# Altium PCB PCB.PcbDoc
Units mm, origin at the board's own origin, x right, y up, seen from the top; angles counter-clockwise.
Board outline 23 x 36 mm, 2 copper layers (Top Layer, Bottom Layer); 17 components, 17 nets, 73 pads, 22 vias.
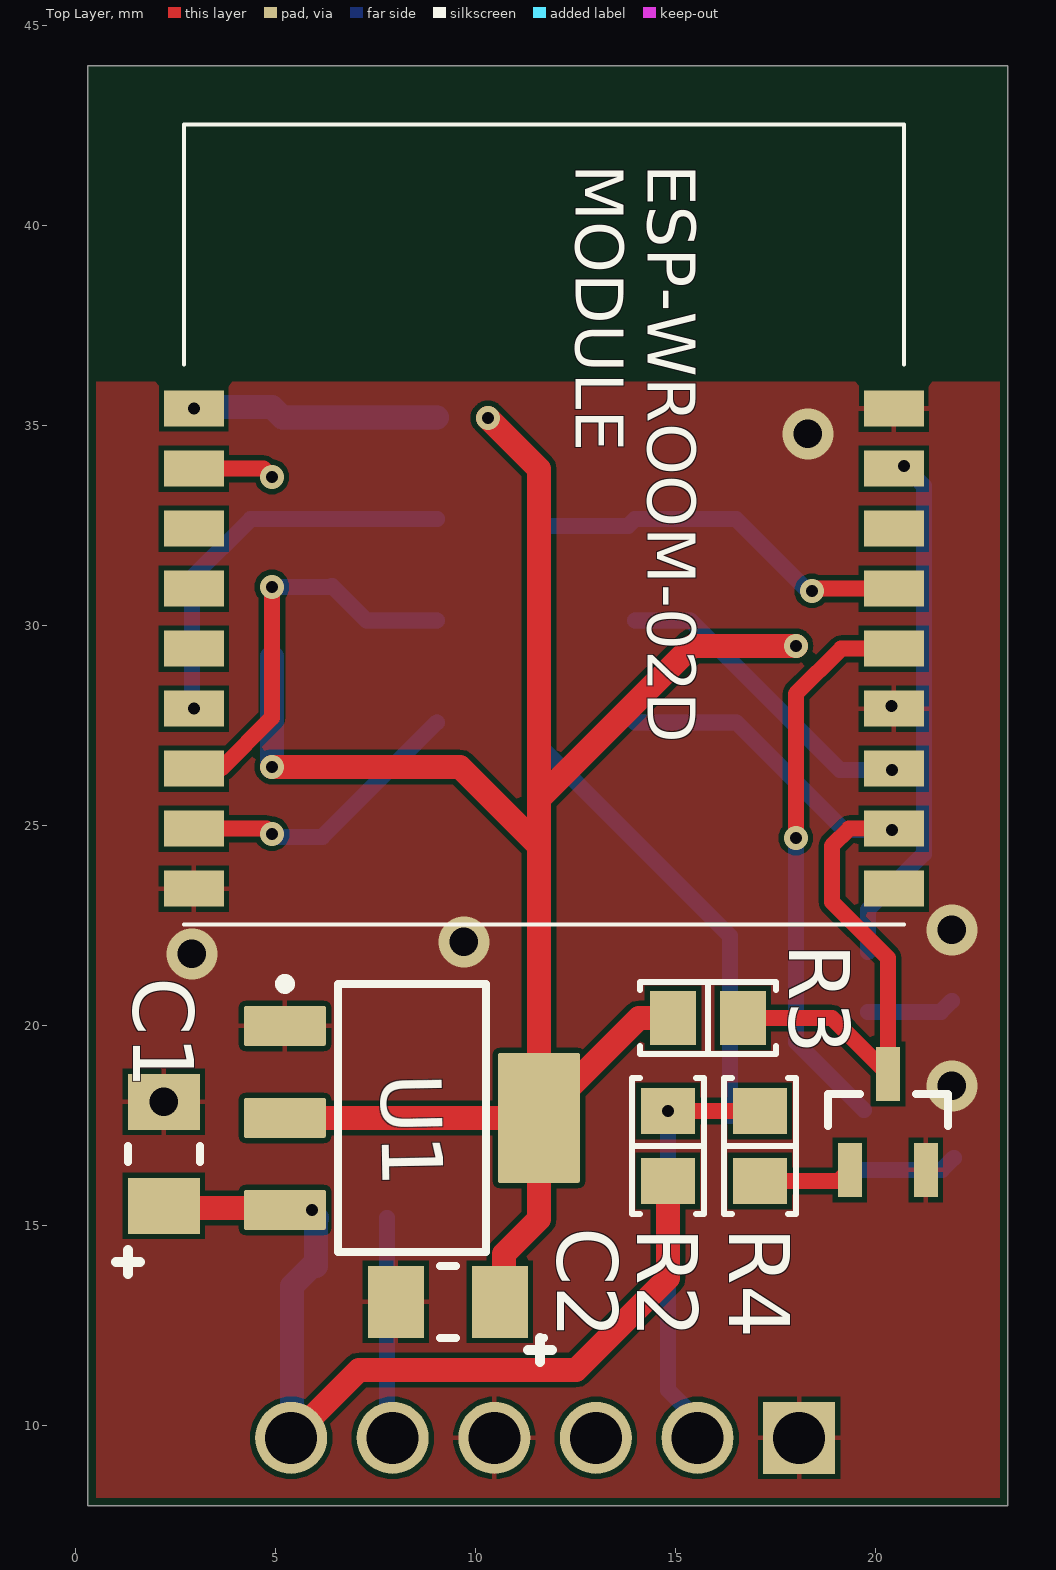
[diagram p0: Top Layer view]
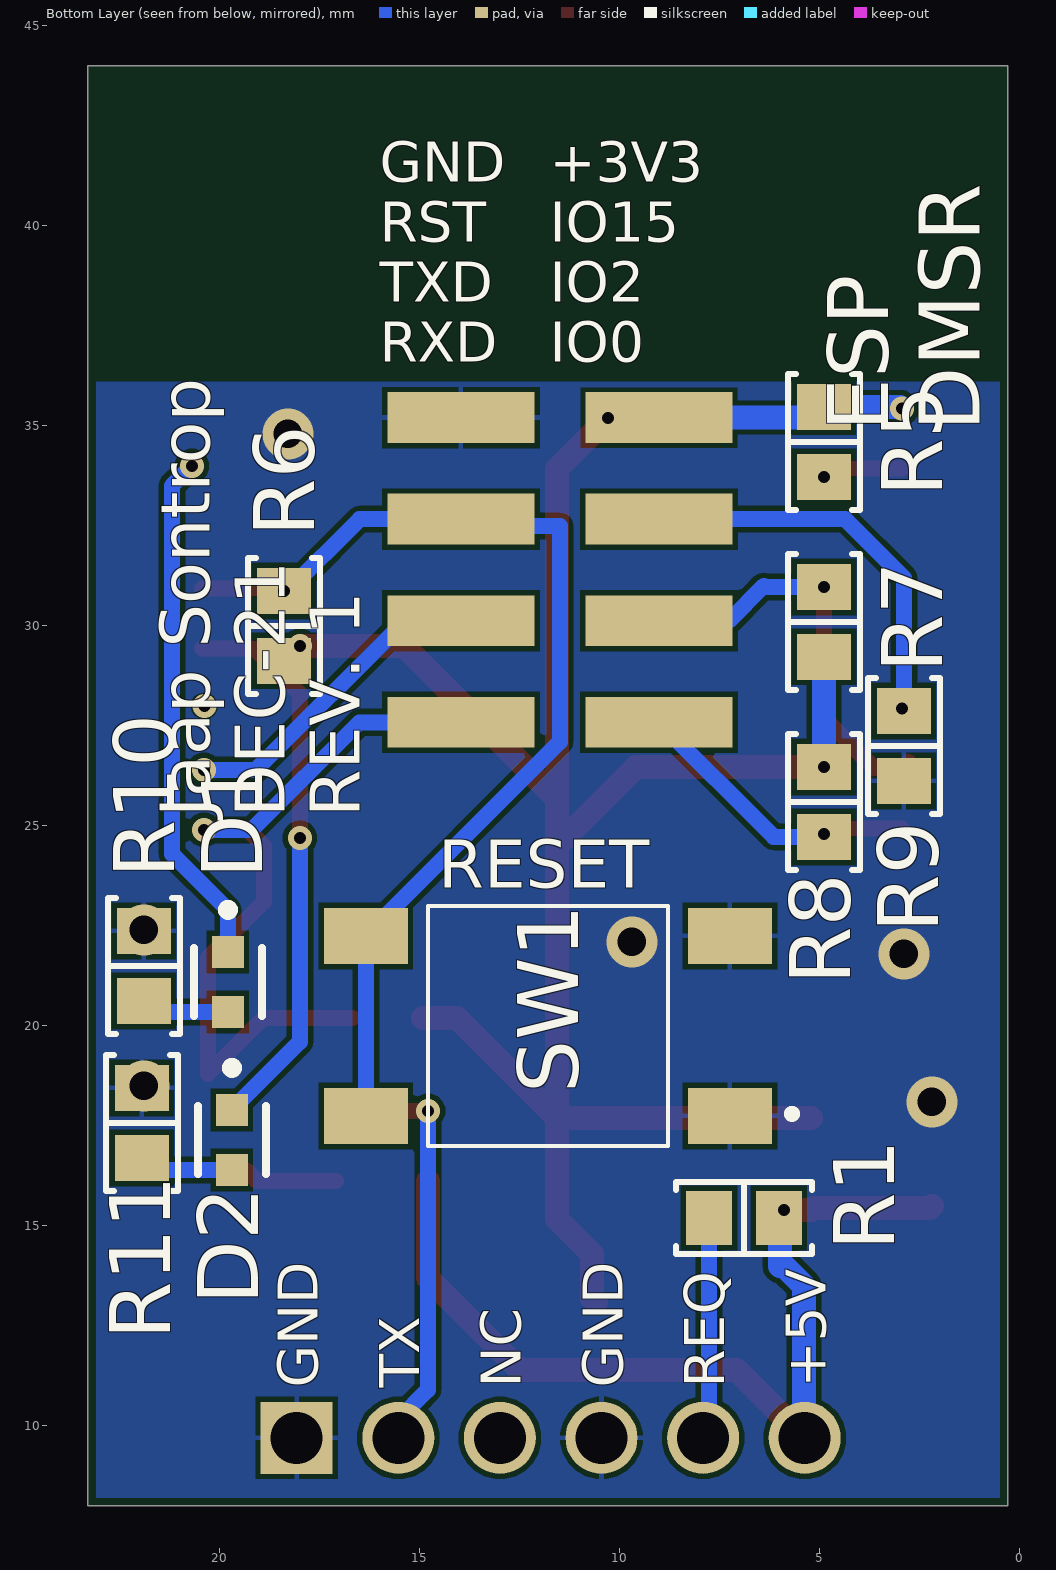
[diagram p1: Bottom Layer view, seen from below]
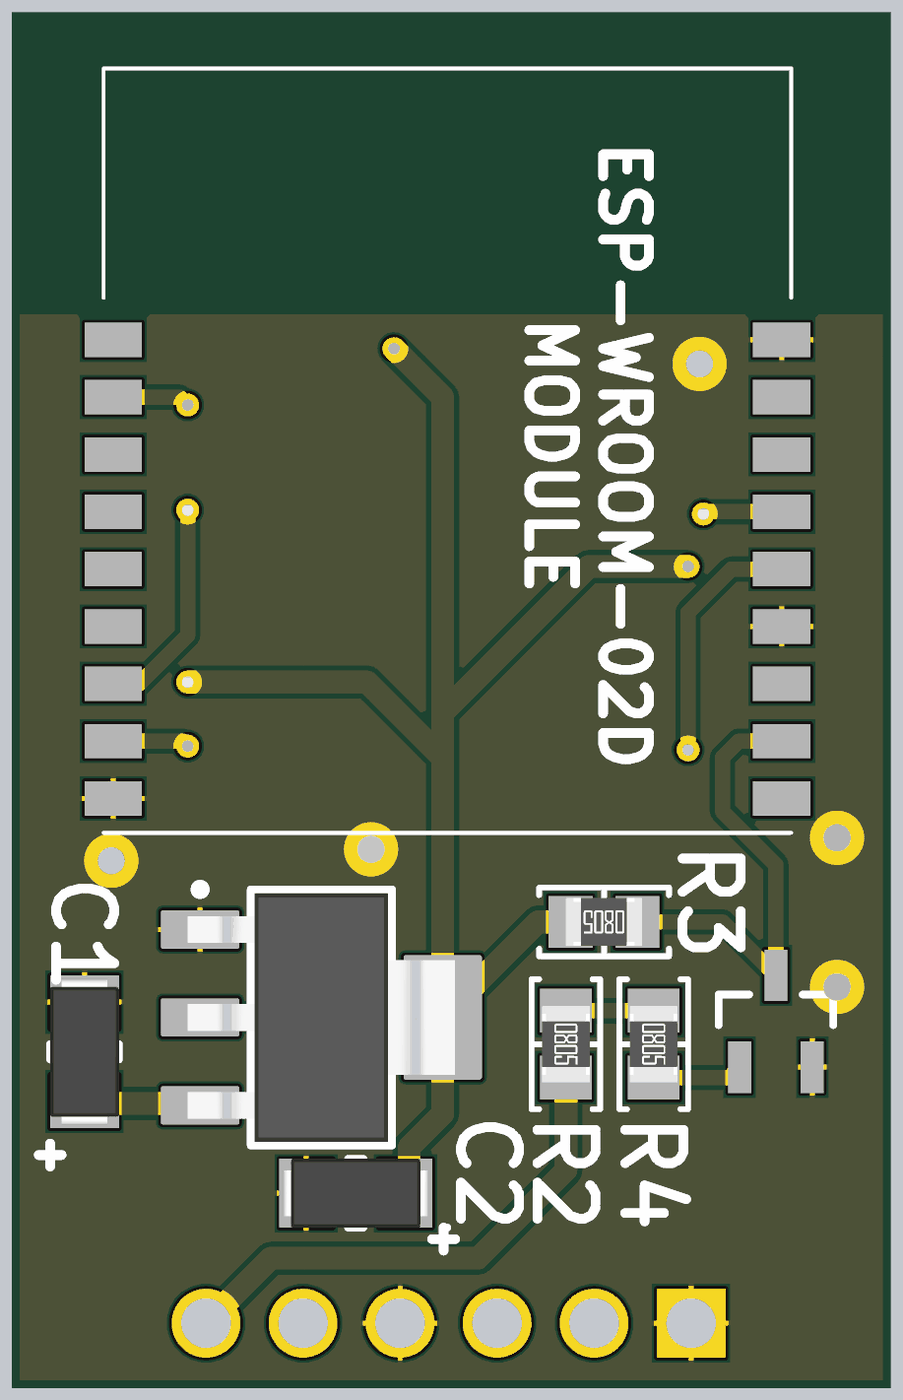
[diagram p2: 3D render of the assembled board from above, using the file's embedded part models]
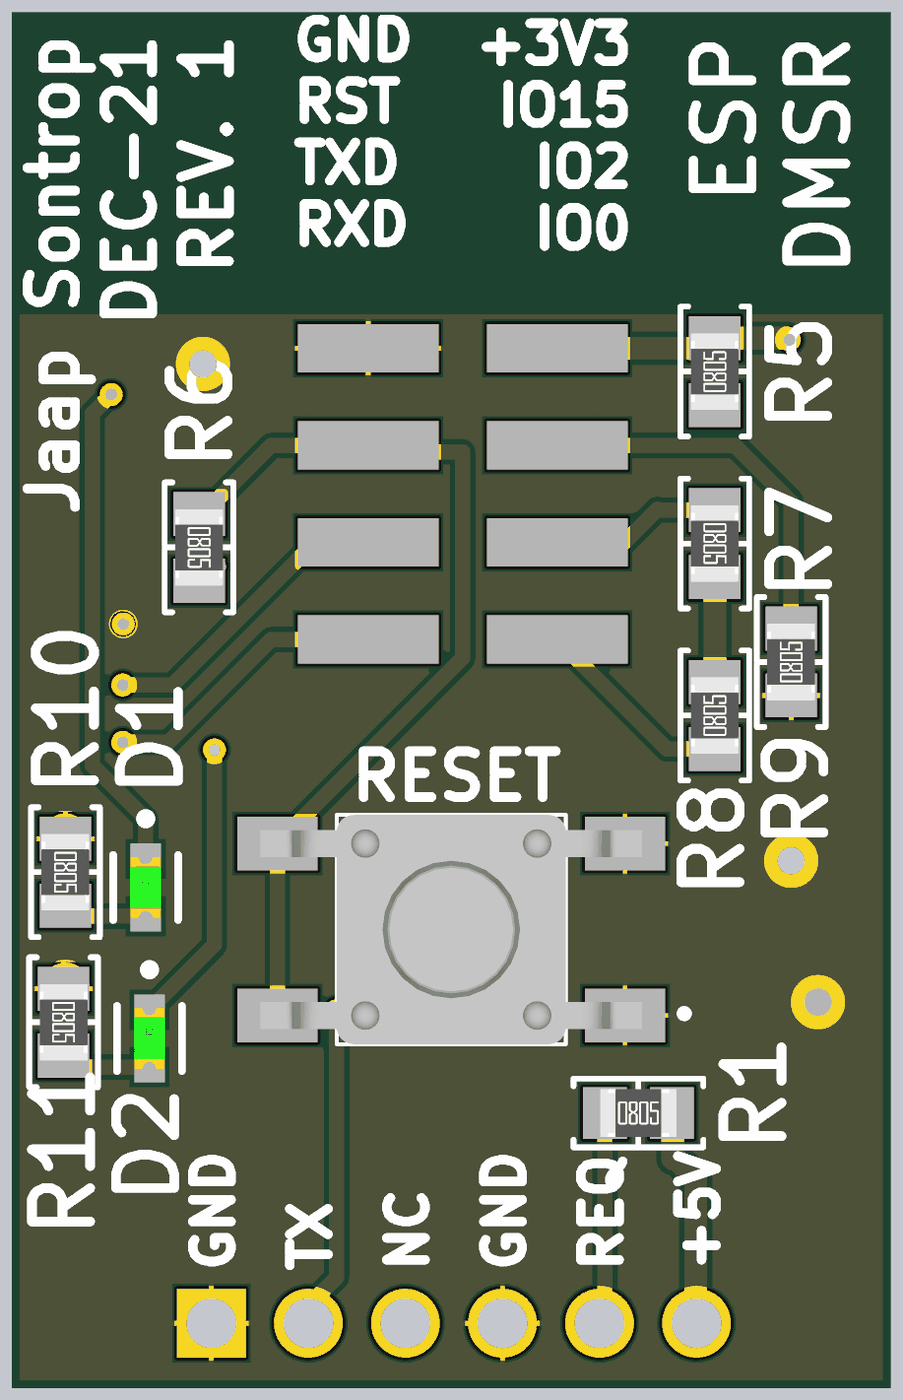
[diagram p3: 3D render of the assembled board from below, using the file's embedded part models]

## Layer stack, top to bottom
Top Solder: solder mask 0.0102, Solder Resist, Dk 3.5
Top Layer: signal copper 0.0356
Dielectric 1: dielectric 0.32, FR-4, Dk 4.8
Bottom Layer: signal copper 0.0356
Bottom Solder: solder mask 0.0102, Solder Resist, Dk 3.5

## Board outline
0.3,8 23.3,8 23.3,44 0.3,44

## Design rules (kind name [scope] priority, off if disabled: settings)
BoardOutlineClearance [All] p1: gap=0.2 ignorepadtopadclearanceinfootprint=FALSE
Clearance [All] p1: gap=0.127 ignorepadtopadclearanceinfootprint=FALSE except(0.25: Arc-Hole Track-Hole SMDPad-Hole THPad-Hole Via-Hole Fill-Hole Poly-Hole Region-Hole Text-Hole)
ComponentClearance [All] p1: gap=0.127 collisioncheckmode=3 verticalgap=0.127 showdistances=TRUE
DiffPairsRouting [All] p1: maxlimit=0.254 minlimit=0.127 mostfreqgap=0.127 toplayer_minwidth=0.127 toplayer_maxwidth=25.4 toplayer_prefwidth=0.127 bottomlayer_minwidth=0.127 bottomlayer_maxwidth=25.4 bottomlayer_prefwidth=0.127 maxuncoupledlength=12.7
Height [All] p1: minheight=0 maxheight=1816.048 prefheight=12.7
HoleSize [All] p1: absolutevalues=TRUE maxlimit=6.3 minlimit=0.3 maxpercent=80.000 minpercent=20.000
HoleToHoleClearance [All] p1: gap=0.25 allowstackedmicrovias=FALSE
MinimumAnnularRing [All] p1: minimumring=0.076
MinimumSolderMaskSliver [All] p1: minsoldermaskwidth=0
PlaneClearance [All] p1: clearance=0.127
PlaneConnect PlaneConnectPowerPads [InPadClass('PowerPads')] p1: planeconnectstyle=Direct reliefexpansion=0.508 reliefentries=4 reliefconductorwidth=0.254 reliefairgap=0.254
PlaneConnect [All] p2: pad.planeconnectstyle=Relief pad.reliefexpansion=0.3 pad.reliefentries=4 pad.reliefconductorwidth=0.127 pad.reliefairgap=0.127 via.planeconnectstyle=Direct via.reliefexpansion=0.3 via.reliefentries=4 via.reliefconductorwidth=0.127 via.reliefairgap=0.127
PolygonConnect PolygonConnectPowerPads [All vs (InPadClass('PowerPads'))] p1: connectstyle=Direct reliefconductorwidth=0.254 reliefentries=4 polygonreliefangle="90 Angle" airgapwidth=0.254
PolygonConnect [All] p2: thpad.connectstyle=Relief thpad.reliefconductorwidth=0.127 thpad.reliefentries=4 thpad.polygonreliefangle="90 Angle" thpad.airgapwidth=0.127 smdpad.connectstyle=Relief smdpad.reliefconductorwidth=0.127 smdpad.reliefentries=4 smdpad.polygonreliefangle="90 Angle" smdpad.airgapwidth=0.127 via.connectstyle=Direct via.reliefconductorwidth=0.127 via.reliefentries=4 via.polygonreliefangle="90 Angle" via.airgapwidth=0.127
RoutingVias [All] p1: holewidth=0.3 width=0.6 viastyle="Through Hole" minholewidth=0.3 minwidth=0.6 maxholewidth=0.6 maxwidth=6.6
SilkToSilkClearance [All] p1: silktosilkclearance=0
SilkToSolderMaskClearance [IsPad] p1: minsilkscreentomaskgap=0.127 clearancetoexposedcopper=TRUE
SolderMaskExpansion [All] p1: expansion=0.075 istentingtop=FALSE
Width Power_width [(InNet('+3V3') OR InNet('+5V'))] p1: maxlimit=1 minlimit=0.3 preferedwidth=0.6 // Power traces
Width [All] p2: maxlimit=0.508 minlimit=0.2 preferedwidth=0.4
20 further rules are at their usual default settings.

## Components (designator, comment, footprint, x,y, rotation, side; value= is the part's Value field where it differs from the comment)
C1 "TAJA106K016RNJ" CAPMP3217X18-T_V 2.2,16.8 r90 top
C2 "TAJA106K016RNJ" CAPMP3217X18-T_V 9.3,13.1 r180 top
D1 "LTST-C190GKT" FP-LTST-C190GKT-MFG 19.8,21.1 r270 bottom
D2 "LTST-C190GKT" FP-LTST-C190GKT-MFG 19.7,17.15 r270 bottom
R1 "10 kOhms" "RES 0805_2012" 6.9,15.2 r180 bottom
R2 "2.2 kOhms" "RES 0805_2012" 14.8,17 r270 top
R3 "2.2 kOhms" "RES 0805_2012" 15.8,20.2 r180 top
R4 "1 kOhms" "RES 0805_2012" 17.1,17 r270 top
R5 "10 kOhms" "RES 0805_2012" 4.9,34.6 r90 bottom
R6 "10 kOhms" "RES 0805_2012" 18.4,30 r270 bottom
R7 "10 kOhms" "RES 0805_2012" 4.9,30.1 r270 bottom
R8 "10 kOhms" "RES 0805_2012" 4.9,25.6 r90 bottom
R9 "10 kOhms" "RES 0805_2012" 2.9,27 r90 bottom
R10 "200 Ohms" "RES 0805_2012" 21.9,21.5 r270 bottom
R11 "200 Ohms" "RES 0805_2012" 21.95,17.575 r270 bottom
SW1 "LL3301NF065QG" LL3301NF065QG 11.8,20 r0 bottom
U1 "REG1117-3.3" DCY0004A_M 8.4,17.7 r0 top

## Footprints (in the part's own frame and the unit in brackets; to place one, negate y for a bottom-side part, rotate by r counter-clockwise, add the part's x,y. Pads: shape width x height; smd on the part's side, far side on the other; paste and mask are expansions set on the pad)
CAPMP3217X18-T_V [mm] "Molded Capacitor, 2-Leads, Body 3.40x1.8mm"
  rect 1.4x1.8 smd: 1(-1.3,0) 2(1.3,0)
  silkscreen extent -2.45,-0.9 0.2,0.95, body extent -1.92,-0.9 1.92,0.9, height 1.8
DCY0004A_M [mm] "SOT223, 4-Leads, Body 6.7x3.7mm, Pitch 2.3mm, IPC Low Density"
  rrect10% 2.05x1 smd: 1(-3.175,2.3) 2(-3.175,0) 3(-3.175,-2.3)
  rrect5% 2.05x3.25 smd: 4(3.175,0)
  silkscreen extent -3.3,-3.35 1.85,3.47, body extent -3.5,-3.25 3.5,3.25, height 1.62
FP-LTST-C190GKT-MFG [mm]
  rect 0.8x0.8 smd paste+0 mask+0: 1(-0.75,0) 2(0.75,0)
  silkscreen extent -1.92,-0.85 0.85,0.85, body extent -0.8,-0.4 0.8,0.4, height 0.9
LL3301NF065QG [mm]
  rect 2.1x1.4 smd: 1(-4.55,2.25) 2(4.55,2.25) 3(-4.55,-2.25) 4(4.55,-2.25)
  silkscreen extent -6.2,-3 3,3, body extent -5,-3 5,3, height 4.45
"RES 0805_2012" [mm] "Chip Resistor, 2-Leads, Body 2.00x1.25mm, IPC Medium Density"
  rect 1.15x1.35 smd: 1(-0.875,0) 2(0.875,0)
  silkscreen extent -1.7,-0.9 1.7,0.9, body extent -1,-0.62 1,0.63, height 0.6

## Part data
C1 C2: library part CMP-1661-00004-1, "Standard Tantalum, 10 uF, +/- 10%, 16 V, -55 to 125 degC, 2-Pin SMD (1206), RoHS, Tape and Reel", Case\Package=SOT-26, Frequency="300 MHz", Max Operating Temperature="150 degC", Max Power Dissipation="300 mW", Min Operating Temperature="-55 degC", Package Quantity=3000, ComponentLink1Description="Manufacturer URL", ComponentLink1URL=http://www.avx.com/, ComponentLink2Description=Datasheet, ComponentLink2URL=http://datasheets.avx.com/TAJ.pdf, ComponentLink3Description="Package Specification", ComponentLink3URL=http://www.avx.com/download/software/literature/AVX-Footprint-Library.pdf, DatasheetVersion=Feb-16, Elements=2, Height="1.3 mm", hFE Min=60, Length="3.1 mm", Mount="Surface Mount", PackageDescription="2-Pin Surface Mount Device, Body 3.2 x 1.65 mm", PackageReference=CAPMP3217X18-T, Packaging="Tape and Reel", Pins=6, Radiation Hardening=No, REACH SVHC="No SVHC", RoHSCompliant=true, Vce Max="500 mV", Width="1.7 mm"
D1 D2: library part CMP-22017-000005-2, "LED GREEN CLEAR CHIP SMD", Case Code (Imperial)=0603, Case Code (Metric)=1608, Color=Green, Forward Current=30mA, Forward Voltage=2.1V, Lens Color=Colorless, Max Operating Temperature=85°C, Min Operating Temperature=-55°C, Package Quantity=1, Power Dissipation=100mW, Reverse Voltage=5V, Test Current=10mA, Voltage=2V, Case/Package=0603, Depth=0.8mm, Dominant Wavelength=569nm, Height=0.8mm, Illumination Color=Green, Lead Free="Lead Free", Length=1.6mm, Lens Style=Clear, Lens Transparency=Clear, Luminous Intensity=6mcd, Mount="Surface Mount", Number of Elements=1, Number of LEDs=1, Number of Pins=2, Packaging="Tape and Reel", Power Rating=100mW, Radiation Hardening=No, Viewing Angle=130°, Wavelength=565nm, Width=0.8mm
R1 R5 R6 R7 R8 R9: library part RNCS0805BKE10K0, "RES 10K OHM 0.1% 1/10W 0805", Device Package="0805 (2012 Metric)", Manufacturer="Stackpole Electronics Inc", Operating Temperature="-55°C ~ 155°C", Power (Watts)="0.1W, 1/10W", Ratings=AEC-Q200, Supplier Device Package=0805, Supplier Part Number 1=RNCS0805BKE10K0CT-ND, Temperature Coefficient=±25ppm/°C, Tolerance=±0.1%, ComponentLink1Description=Datasheet, ComponentLink1URL=https://www.seielect.com/catalog/sei-rncs_rnch.pdf, ComponentLink2Description="DigiKey Link", ComponentLink2URL=http://digikey.com/product-detail/en/stackpole-electronics-inc/RNCS0805BKE10K0/RNCS0805BKE10K0CT-ND/1800164, Composition="Thin Film", Features="Anti-Corrosive, Automotive AEC-Q200, Moisture Resistant", Height - Seated (Max)="0.026\" (0.65mm)", LastUpdated="9/2/2020 1:15:24 AM", Lifecycle Status=Active, Minimum Order=1, Number of Terminations=2, Package / Case="0805 (2012 Metric)", Packaging=TapeAndReel, Part Number=RNCS0805BKE10K0, Part Status=Active, PartId=27713, Price=0.09, Resistance="10 kOhms", Series=RNCS, Size / Dimension="0.079\" L x 0.049\" W (2.00mm x 1.25mm)", Supplier 1=DigiKey
R2 R3: library part SR0805JR-7W2K2L, "RES SMD 2.2K OHM 5% 1/4W 0805", Device Package="0805 (2012 Metric)", Manufacturer=Yageo, Operating Temperature="-55°C ~ 155°C", Power (Watts)="0.25W, 1/4W", Ratings=AEC-Q200, Supplier Device Package=0805, Supplier Part Number 1=YAG6054CT-ND, Temperature Coefficient=±200ppm/°C, Tolerance=±5%, ComponentLink1Description=Datasheet, ComponentLink1URL=http://www.yageo.com/documents/recent/PYu-SR_20105_RoHS_L_8.pdf, ComponentLink2Description="DigiKey Link", ComponentLink2URL=http://digikey.com/product-detail/en/yageo/SR0805JR-7W2K2L/YAG6054CT-ND/9696508, Composition="Thick Film", Features="Automotive AEC-Q200, Pulse Withstanding", Height - Seated (Max)="0.024\" (0.60mm)", LastUpdated="9/2/2020 1:15:24 AM", Lifecycle Status=Active, Minimum Order=1, Number of Terminations=2, Package / Case="0805 (2012 Metric)", Packaging=TapeAndReel, Part Number=SR0805JR-7W2K2L, Part Status=Active, PartId=27793, Price=0.03, Resistance="2.2 kOhms", Series=SR, Size / Dimension="0.079\" L x 0.049\" W (2.00mm x 1.25mm)", Supplier 1=DigiKey
R4: library part RNCS0805BKE1K00, "RES 1K OHM 0.1% 1/10W 0805", Device Package="0805 (2012 Metric)", Manufacturer="Stackpole Electronics Inc", Operating Temperature="-55°C ~ 155°C", Power (Watts)="0.1W, 1/10W", Ratings=AEC-Q200, Supplier Device Package=0805, Supplier Part Number 1=RNCS0805BKE1K00CT-ND, Temperature Coefficient=±25ppm/°C, Tolerance=±0.1%, ComponentLink1Description=Datasheet, ComponentLink1URL=https://www.seielect.com/catalog/sei-rncs_rnch.pdf, ComponentLink2Description="DigiKey Link", ComponentLink2URL=http://digikey.com/product-detail/en/stackpole-electronics-inc/RNCS0805BKE1K00/RNCS0805BKE1K00CT-ND/1800170, Composition="Thin Film", Features="Anti-Corrosive, Automotive AEC-Q200, Moisture Resistant", Height - Seated (Max)="0.026\" (0.65mm)", LastUpdated="9/2/2020 1:15:24 AM", Lifecycle Status=Active, Minimum Order=1, Number of Terminations=2, Package / Case="0805 (2012 Metric)", Packaging=TapeAndReel, Part Number=RNCS0805BKE1K00, Part Status=Active, PartId=27715, Price=0.09, Resistance="1 kOhms", Series=RNCS, Size / Dimension="0.079\" L x 0.049\" W (2.00mm x 1.25mm)", Supplier 1=DigiKey
R10 R11: library part ERJ-PB6D2000V, "RES SMD 200 OHM 0.5% 1/4W 0805", Device Package="0805 (2012 Metric)", Manufacturer="Panasonic Electronic Components", Operating Temperature="-55°C ~ 155°C", Power (Watts)="0.25W, 1/4W", Ratings=AEC-Q200, Supplier Device Package=0805, Supplier Part Number 1=P20937CT-ND, Temperature Coefficient=±50ppm/°C, Tolerance=±0.5%, ComponentLink1Description=Datasheet, ComponentLink1URL=https://industrial.panasonic.com/cdbs/www-data/pdf/RDM0000/AOA0000C328.pdf, ComponentLink2Description="DigiKey Link", ComponentLink2URL=http://digikey.com/product-detail/en/panasonic-electronic-components/ERJ-PB6D2000V/P20937CT-ND/6215192, Composition="Thick Film", Features="Automotive AEC-Q200, Pulse Withstanding", Height - Seated (Max)="0.028\" (0.70mm)", LastUpdated="9/2/2020 1:15:24 AM", Lifecycle Status=Active, Minimum Order=1, Number of Terminations=2, Package / Case="0805 (2012 Metric)", Packaging=TapeAndReel, Part Number=ERJ-PB6D2000V, Part Status=Active, PartId=27735, Price=0.03, Resistance="200 Ohms", Series=ERJ, Size / Dimension="0.079\" L x 0.049\" W (2.00mm x 1.25mm)", Supplier 1=DigiKey
SW1: "Switch", Manufacturer_Name=E-Switch, Mouser2 Part Number=612-LL3301NF065QG, Datasheet Link=https://componentsearchengine.com//LL3301NF065QG.pdf, Height=4mm, Manufacturer_Part_Number=LL3301NF065QG, Mouser2 Price/Stock=https://www.mouser.com/Search/Refine.aspx?Keyword=612-LL3301NF065QG
U1: library part CMP-0395-00549-2, "Single Output LDO, 800 mA, Fixed 3.3 V Output, 3.8 to 15 V Input, with Internal Current Limiting, 4-pin SOT-223 (DCY), -40 to 125 degC, Green (RoHS & no Sb/Br)", Manufacturer="Texas Instruments", Rating=Catalog, Code_JEDEC=TO-261, ComponentLink1Description="Manufacturer URL", ComponentLink1URL=http://www.ti.com/, ComponentLink2Description=Datasheet, ComponentLink2URL=http://www.ti.com/general/docs/lit/getliterature.tsp?genericPartNumber=REG1117-33&fileType=pdf, ComponentLink3Description="Package Specification", ComponentLink3URL=http://www.ti.com/litv/pdf/mpds094a, DatasheetVersion=SBVS001D, Eco-Plan="Green (RoHS & no Sb/Br)", Fixed Output Options(V)=5, Iout(Max)(A)=0.8, Iq(Typ)(mA)=4, Mounting Technology="Surface Mount", PackageDescription="4-Pin Plastic Small Outline, Body 3.5 x 6.5 mm, Pitch 2.3 mm", PackageReference=DCY0004A, PackageVersion=4202506/B, PartNumber=REG1117-3.3, SubFamily="Single Channel LDO", Vdo(Typ)(mV)=1100, Vin(Max)(V)=15, Vin(Min)(V)=3.8, Vout Adj(Max)(V)=3.3, Vout Adj(Min)(V)=3.3

## Free pads (board coordinates)
  rect 1.5x0.9 smd: 1(2.95,35.431) 2(2.95,33.931) 3(2.95,32.431) 4(2.95,30.931) 5(2.95,29.431) 6(2.95,27.931) 7(2.95,26.431) 8(2.95,24.931) 9(2.95,23.431) 10(20.45,23.431) 11(20.45,24.931) 12(20.45,26.431) 13(20.45,27.931) 14(20.45,29.431) 15(20.45,30.931) 16(20.45,32.431) 17(20.45,33.931) 18(20.45,35.431)
  rect 3.68x1.27 smd far side: 1(13.975,27.59) 2(9.025,27.59) 3(13.975,30.13) 4(9.025,30.13) 5(13.975,32.67) 6(9.025,32.67) 7(13.975,35.21) 8(9.025,35.21)
  rect 1.8x1.8 hole 1.3: 1(18.08,9.7)
  rect 0.6x1.35 smd: 1(19.35,16.4) 2(21.25,16.4) 3(20.3,18.8)
  round 1.8 hole 1.3: 2(15.54,9.7) 3(13,9.7) 4(10.46,9.7) 5(7.92,9.7) 6(5.38,9.7)

## Via types
v1: diameter 0.6, hole 0.3, Top Layer to Bottom Layer, 16 vias
v2: diameter 1.27, hole 0.711, Top Layer to Bottom Layer, 6 vias

## Nets (pads, with @x,y where several pads share a name; then routed paths per layer and width w, separated by ;. In a path a pad name is that pad's centre, name@x,y a point inside that pad or via, vN(x,y) a via of type N, cw(c..) or ccw(c..) an arc to the next point about the centre after c; other vN are vias at no path point)
+3V3: C2.1 pad.1@2.95,35.431 pad.8@9.025,35.21 R3.2 R5.2 R6.2 R7.2 R8.2 U1.2 U1.4 | length 58.2
  Top Layer w0.6: v1(4.9,26.475) 9.6,26.475 11.575,24.5 ; U1.2 U1.4 ; v1(10.3,35.2) 11.575,33.925 11.575,25.675 ; C2.1 10.7,13.2 10.7,14.3 11,14.6 11.575,15.175 U1.4 ; R3.2 14.075,20.2 U1.4 ; v1(18,29.5) 15.4,29.5 11.575,25.675 ; U1.4 11.575,24.5 ; 11.575,24.5 11.575,25.675
  Bottom Layer w0.6: v1(2.95,35.431) 2.994,35.475 R5.2 5.165,35.21 pad.8@9.025,35.21 ; v1(4.9,26.475) R7.2
+5V: C1.1 pad.6@5.38,9.7 R1.2 R2.2 U1.3 | length 23.1
  Top Layer w0.6: C1.1 2.25,15.45 5.175,15.45 U1.3 v1(5.9,15.4) ; pad.6@5.38,9.7 7.08,11.4 12.5,11.4 14.8,13.7 R2.2
  Bottom Layer w0.6: pad.6@5.38,9.7 5.4,9.72 5.4,13.5 5.9,14 6,14 6,15.175 R1.2
GND: C1.2 C2.2 pad.1@18.08,9.7 pad.2@21.25,16.4 pad.4@10.46,9.7 pad.7@13.975,35.21 pad.9 pad.13 pad.18 R9.1 R10.1 R11.1 SW1.1 SW1.3 U1.1 | length 0.1
  Top Layer w0.4: v1(20.386,27.994) pad.13
  Bottom Layer w0.4: v1(20.386,27.994) 20.392,28 v1@20.4,28
  other v2: 2.2,18.1 21.9,18.5 2.9,21.8 9.7,22.1 21.9,22.4 18.3,34.8
IO0: pad.2@9.025,27.59 pad.8@2.95,24.931 R8.1 | length 7.3
  Top Layer w0.4: pad.8@2.95,24.931 4.769,24.931 v1(4.9,24.8)
  Bottom Layer w0.4: R8.1 6.16,24.725 pad.2@9.025,27.59
IO2: pad.4@9.025,30.13 pad.7@2.95,26.431 R7.1 | length 10.5
  Top Layer w0.4: pad.7@2.781,26.6 2.95,26.431 3.631,26.431 4.9,27.7 v1(4.9,30.975)
  Bottom Layer w0.4: v1(4.9,30.975) 6.375,30.975 6.4,31 7.27,30.13 pad.4@9.025,30.13
IO15: pad.6@2.95,27.931 pad.6@9.025,32.67 R9.2 | length 10.1
  Bottom Layer w0.4: R9.2 2.9,31.2 4.37,32.67 pad.6@9.025,32.67
  other v1: 2.95,27.931
LED1: D1.1 pad.17 | length 12.9
  Bottom Layer w0.4: D1.1 19.8,22.9 21.2,24.3 21.2,33.5 v1(20.7,34)
LED2: D2.1 pad.14 | length 14
  Top Layer w0.4: v1(18,24.7) 18,28.3 19.131,29.431 pad.14
  Bottom Layer w0.4: v1(18,24.7) 18,19.6 D2.1
NetD1_2: D1.2 R10.2 | length 2.2
  Bottom Layer w0.4: D1.2 21.625,20.35 R10.2
NetD2_2: D2.2 R11.2 | length 2.4
  Bottom Layer w0.4: D2.2 21.65,16.4 R11.2
NetJ1_5: pad.5@7.92,9.7 R1.1 | length 5.6
  Bottom Layer w0.4: R1.1 7.775,9.845 pad.5@7.92,9.7
NetQ1_1: pad.1@19.35,16.4 R4.2 | length 2.4
  Top Layer w0.4: R4.2 19.075,16.125 pad.1@19.35,16.4
NetR5_1: pad.2@2.95,33.931 R5.1 | length 2
  Top Layer w0.4: pad.2@2.95,33.931 4.694,33.931 v1(4.9,33.725)
RST: pad.5@13.975,32.67 pad.15 R6.1 SW1.2 SW1.4 | length 26.5
  Top Layer w0.4: v1(18.4,30.875) 18.456,30.931 pad.15
  Bottom Layer w0.4: SW1.2 SW1.4 11.5,27.1 11.5,32.5 13.805,32.5 13.975,32.67 16.505,32.67 18.3,30.875 v1(18.4,30.875)
RXD: pad.1@13.975,27.59 pad.3@20.3,18.8 pad.11 R3.1 | length 19.8
  Top Layer w0.4: R3.1 18.9,20.2 20.3,18.8 20.3,21.7 18.9,23.1 18.9,24.5 19.331,24.931 pad.11
  Bottom Layer w0.4: pad.1@13.975,27.59 16.51,27.59 19.2,24.9 v1(20.4,24.9)
SM-TX: pad.2@15.54,9.7 R2.1 R4.1 | length 10.8
  Top Layer w0.4: v1(14.8,17.875) R4.1
  Bottom Layer w0.4: v1(14.8,17.875) 14.8,10.9 15.54,10.16 pad.2@15.54,9.7
TXD: pad.3@13.975,30.13 pad.12 | length 8
  Top Layer w0.4: pad.12@20.419,26.4 pad.12
  Bottom Layer w0.4: pad.3@13.975,30.13 15.37,30.13 19.1,26.4 v1(20.4,26.4)

## Polygon pours and split planes (outlines as drawn)
GND on Top Layer "GND_L01_P000" (solid, pour order 0): 0.3,36.1 23.2,36.1 23.2,8 0.3,8
GND on Bottom Layer "GND_L02_P001" (solid, remove dead copper, pour order 1): 0.3,36.1 23.2,36.1 23.2,8 0.3,8

## Silkscreen, mask and mechanical layers (free items; w line width, h text height)
Top Overlay:
  lines w0.1: 2.7,42.531 20.7,42.531 ; 2.7,42.531 20.7,42.531 ; 2.7,42.531 2.7,36.531 2.7,42.531 ; 20.7,42.531 20.7,36.531 20.7,42.531 ; 2.7,22.531 20.7,22.531 2.7,22.531
  lines w0.2: 18.8,17.5 18.8,18.3 19.6,18.3 ; 21,18.3 21.8,18.3 21.8,17.5
  lines w0.254: 1,14.1 1.6,14.1 ; 1.3,13.8 1.3,14.4 ; 11.3,11.9 11.9,11.9 ; 11.6,11.6 11.6,12.2
  text "ESP-WROOM-02D / MODULE" at 12.5,41.541 h1.2 r270
Bottom Overlay:
  text "+3V3 / IO15 / IO2 / IO0" at 11.75,36.6 h1
  text "GND / RST / TXD / RXD" at 16,36.6 h1
  text "ESP / DMSR" at 1,34.867 h1.52 r270
  text "Jaap Sontrop / DEC-21 / REV. 1" at 16.5,25.218 h1.25 r270
  text "RESET" at 14.546,23.454 h1.2
  text "+5V" at 4.854,10.954 h1 r270
  text "REQ" at 7.394,10.954 h1 r270
  text "GND" at 9.934,10.954 h1 r270
  text "NC" at 12.474,10.954 h1 r270
  text "TX" at 15.014,10.954 h1 r270
  text "GND" at 17.554,10.954 h1 r270
Mechanical 13:
  lines w0.1: 8.96,26.32 14.04,26.32 ; 8.96,36.48 14.04,36.48 ; 18.8,16.9 18.8,18.3 21.8,18.3 21.8,16.9 18.8,16.9
  lines w0.2: 2.7,22.531 20.7,22.531 20.7,42.531 2.7,42.531 2.7,22.531
Mechanical 15:
  lines w0.05: 7.06,26.095 7.06,36.705 15.94,36.705 15.94,26.095 7.06,26.095 ; 18.3,15.225 18.3,19.975 22.3,19.975 22.3,15.225 18.3,15.225
  lines w0.1: 11,31.4 12,31.4 ; 11.5,30.9 11.5,31.9 ; 19.8,17.6 20.8,17.6 ; 20.3,17.1 20.3,18.1 ; 0.1,21.531 22.2,21.531 22.2,43.531 0.1,43.531 0.1,21.531